# EAGLE board board_fertig (EAGLE 8.4.1)
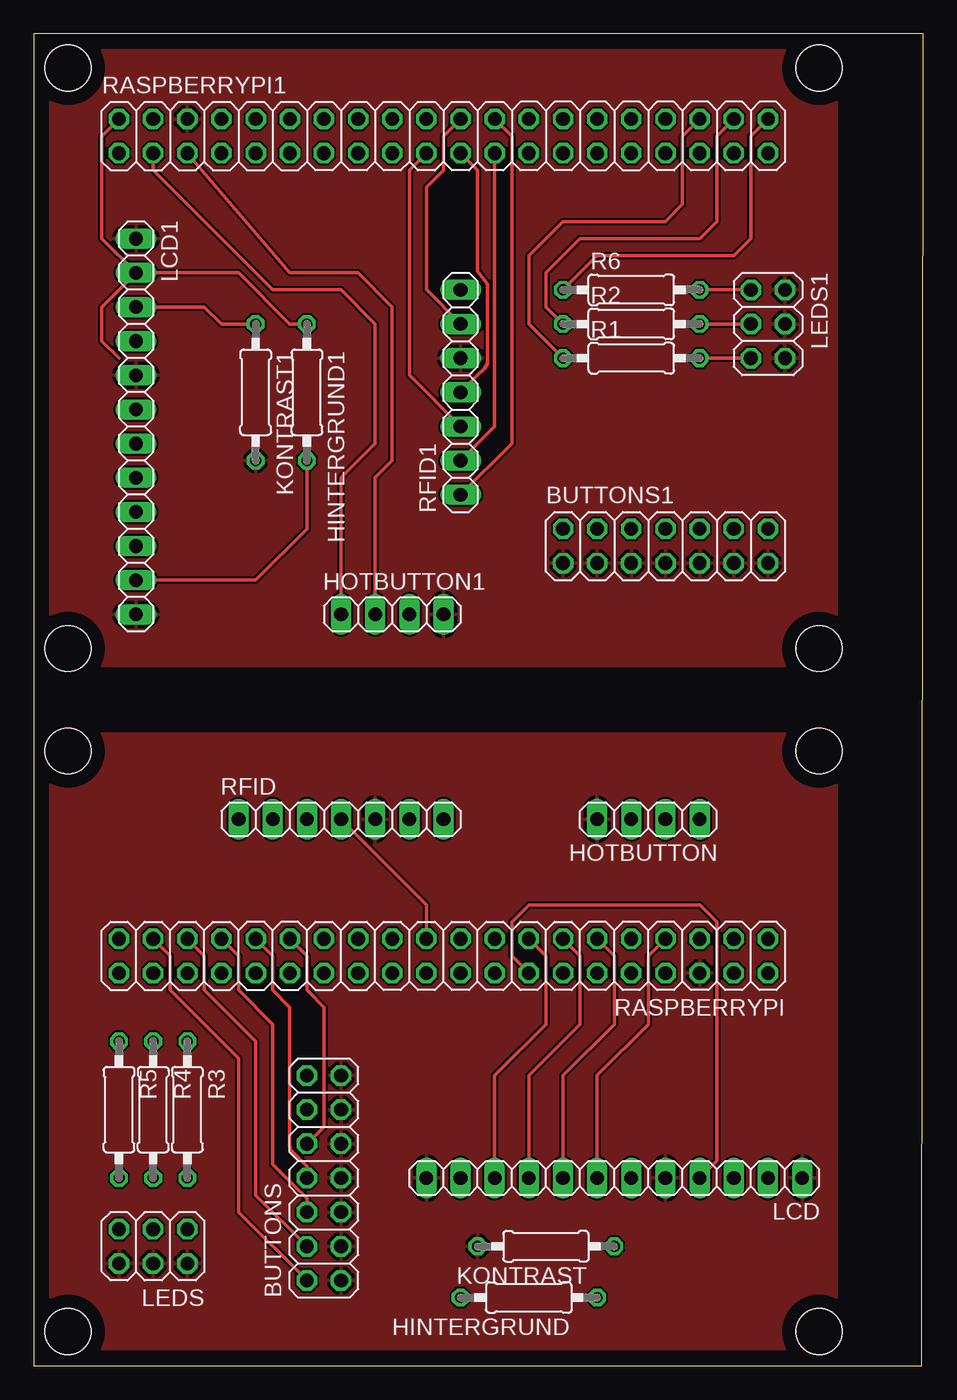
[diagram p0: board, top side]
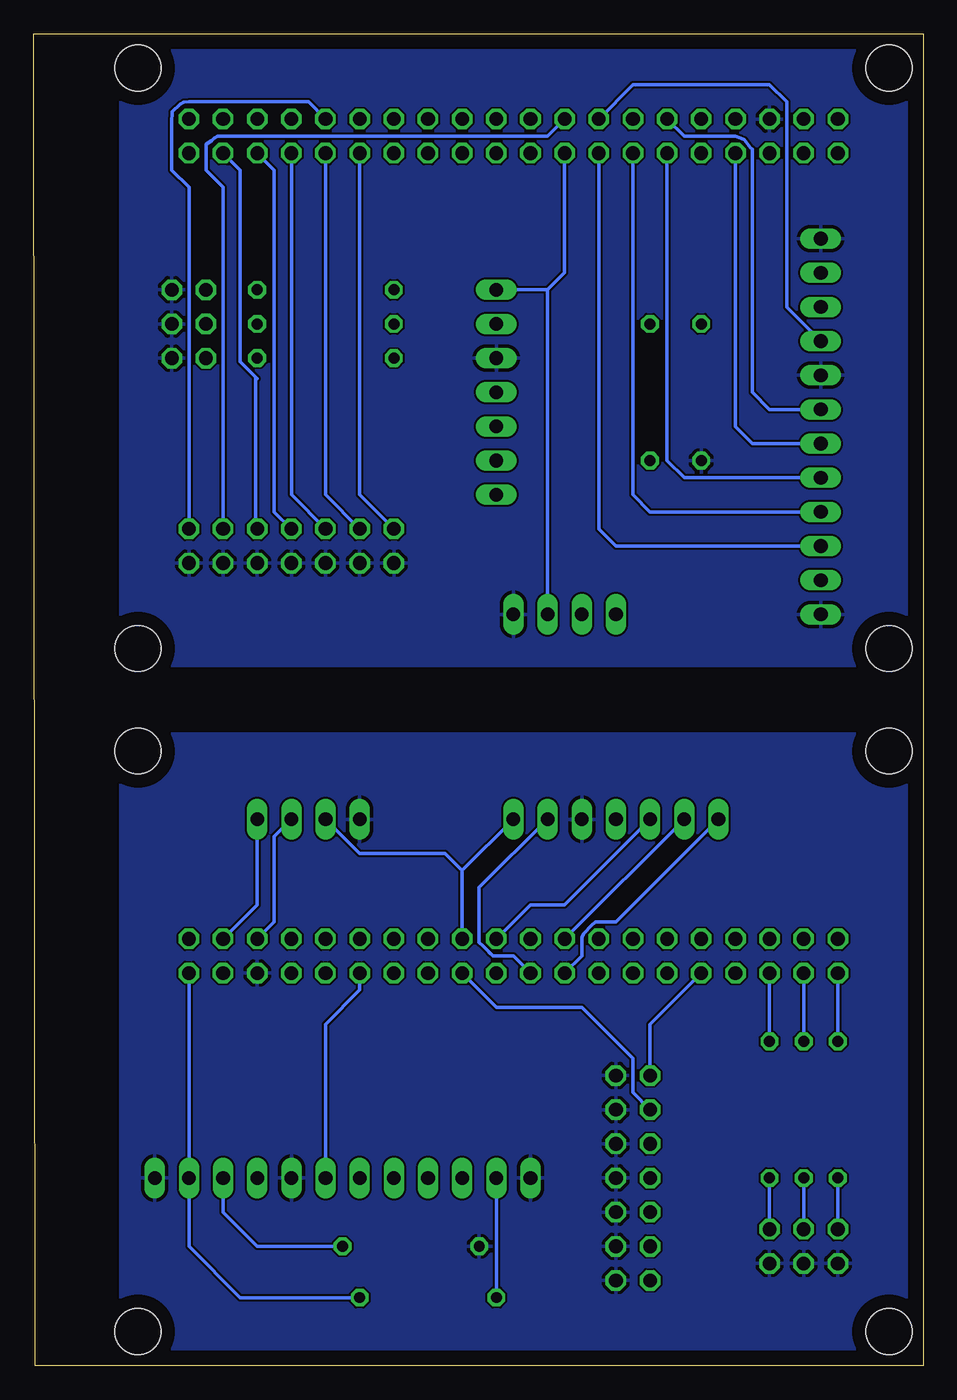
[diagram p1: board, bottom side, seen from below]

Size 66.16 x 99.06 mm. Coordinates in mm from the lower left corner, seen from the top.
Outline: 0,0 66.04,0 66.16,99.05 0.01,99.06 0,0
Copper layers (1*16): Top 0.035mm / dielectric 1.5mm / Bottom 0.035mm
Design rules "default": minimum track width 6mil, minimum drill 0.35mm, track to track 6mil, track to pad 6mil, pad to pad 6mil, via to via 6mil, smd to smd 6mil, copper to edge 40mil, drill to drill 6mil, minimum pad ring 10mil, minimum via ring 8mil, stop-mask expansion 4mil, vias tented up to drill 0mil, thermal gap 10mil
Net classes: 0 default: width 0.254 mm
Holes 3.43 mm at 2.54,45.72 58.42,45.72 2.54,2.54 58.42,2.54 2.54,96.52 58.42,96.52 2.54,53.34 58.42,53.34

## Footprints (pad centres in the part's own frame; a part is rotated, then mirrored left to right if it is on the bottom)
2X07 = drill 1.016 octagon: 1 -7.62,-1.27; 2 -7.62,1.27; 3 -5.08,-1.27; 4 -5.08,1.27; 5 -2.54,-1.27; 6 -2.54,1.27; 7 0,-1.27; 8 0,1.27; 9 2.54,-1.27; 10 2.54,1.27; 11 5.08,-1.27; 12 5.08,1.27; 13 7.62,-1.27; 14 7.62,1.27
0207/10 = drill 0.813 octagon: 1 -5.08,0; 2 5.08,0
1X04 = drill 1.016 long: 1 -3.81,0; 2 -1.27,0; 3 1.27,0; 4 3.81,0
1X12 = drill 1.016 long: 1 -13.97,0; 2 -11.43,0; 3 -8.89,0; 4 -6.35,0; 5 -3.81,0; 6 -1.27,0; 7 1.27,0; 8 3.81,0; 9 6.35,0; 10 8.89,0; 11 11.43,0; 12 13.97,0
2X03 = drill 1.016 octagon: 1 -2.54,-1.27; 2 -2.54,1.27; 3 0,-1.27; 4 0,1.27; 5 2.54,-1.27; 6 2.54,1.27
2X20 = drill 1.016 octagon: 1 -24.13,-1.27; 2 -24.13,1.27; 3 -21.59,-1.27; 4 -21.59,1.27; 5 -19.05,-1.27; 6 -19.05,1.27; 7 -16.51,-1.27; 8 -16.51,1.27; 9 -13.97,-1.27; 10 -13.97,1.27; 11 -11.43,-1.27; 12 -11.43,1.27; 13 -8.89,-1.27; 14 -8.89,1.27; 15 -6.35,-1.27; 16 -6.35,1.27; 17 -3.81,-1.27; 18 -3.81,1.27; 19 -1.27,-1.27; 20 -1.27,1.27; 21 1.27,-1.27; 22 1.27,1.27; 23 3.81,-1.27; 24 3.81,1.27; 25 6.35,-1.27; 26 6.35,1.27; 27 8.89,-1.27; 28 8.89,1.27; 29 11.43,-1.27; 30 11.43,1.27; 31 13.97,-1.27; 32 13.97,1.27; 33 16.51,-1.27; 34 16.51,1.27; 35 19.05,-1.27; 36 19.05,1.27; 37 21.59,-1.27; 38 21.59,1.27; 39 24.13,-1.27; 40 24.13,1.27
1X07 = drill 1.016 long: 1 -7.62,0; 2 -5.08,0; 3 -2.54,0; 4 0,0; 5 2.54,0; 6 5.08,0; 7 7.62,0

## Placement (x,y rotation side)
BUTTONS  [2X07]  21.59,13.97 90 top
BUTTONS1  [2X07]  46.99,60.96 0 top
HINTERGRUND  [0207/10]  36.83,5.08 180 top
HINTERGRUND1  [0207/10]  20.32,72.39 270 top
HOTBUTTON  [1X04]  45.72,40.64 180 top
HOTBUTTON1  [1X04]  26.67,55.88 0 top
KONTRAST  [0207/10]  38.1,8.89 180 top
KONTRAST1  [0207/10]  16.51,72.39 270 top
LCD  [1X12]  43.18,13.97 180 top
LCD1  [1X12]  7.62,69.85 270 top
LEDS  [2X03]  8.89,8.89 180 top
LEDS1  [2X03]  54.61,77.47 270 top
R1  330  [0207/10]  44.45,74.93 0 top
R2  330  [0207/10]  44.45,77.47 0 top
R3  330  [0207/10]  11.43,19.05 270 top
R4  330  [0207/10]  8.89,19.05 270 top
R5  330  [0207/10]  6.35,19.05 270 top
R6  330  [0207/10]  44.45,80.01 0 top
RASPBERRYPI  [2X20]  30.48,30.48 180 top
RASPBERRYPI1  [2X20]  30.48,91.44 0 top
RFID  [1X07]  22.86,40.64 0 top
RFID1  [1X07]  31.75,72.39 90 top

## Library data of the parts
BUTTONS BUTTONS1 HOTBUTTON HOTBUTTON1 LCD LCD1 LEDS LEDS1 RASPBERRYPI RASPBERRYPI1 RFID RFID1 = pinhead
HINTERGRUND HINTERGRUND1 KONTRAST KONTRAST1 R1-R6 = rcl

## Nets
+3V1: HOTBUTTON1.3 RASPBERRYPI1.17 RFID1.7
+3V3: HOTBUTTON.3 RASPBERRYPI.17 RFID.7
+5V: HINTERGRUND.1 LCD.2 RASPBERRYPI.2
+5V1: HINTERGRUND1.1 LCD1.2 RASPBERRYPI1.2
GND: BUTTONS.1 BUTTONS.3 BUTTONS.5 BUTTONS.7 BUTTONS.9 BUTTONS.11 BUTTONS.13 HOTBUTTON.4 KONTRAST.2 LCD.1 LCD.5 LCD.12 LEDS.2 LEDS.4 LEDS.6 RASPBERRYPI.6 RFID.5
GND1: BUTTONS1.1 BUTTONS1.3 BUTTONS1.5 BUTTONS1.7 BUTTONS1.9 BUTTONS1.11 BUTTONS1.13 HOTBUTTON1.4 KONTRAST1.2 LCD1.1 LCD1.5 LCD1.12 LEDS1.2 LEDS1.4 LEDS1.6 RASPBERRYPI1.6 RFID1.5
N$1: RASPBERRYPI.22 RFID.6
N$2: RASPBERRYPI.24 RFID.1
N$3: RASPBERRYPI.23 RFID.2
N$4: RASPBERRYPI.19 RFID.3
N$5: RASPBERRYPI.21 RFID.4
N$6: KONTRAST.1 LCD.3
N$7: HINTERGRUND.2 LCD.11
N$8: BUTTONS.2 RASPBERRYPI.37
N$9: BUTTONS.4 RASPBERRYPI.35
N$10: RASPBERRYPI1.22 RFID1.6
N$11: LCD.4 RASPBERRYPI.16
N$12: LCD.6 RASPBERRYPI.12
N$13: LCD.7 RASPBERRYPI.7
N$14: LCD.8 RASPBERRYPI.11
N$15: LCD.9 RASPBERRYPI.13
N$16: LCD.10 RASPBERRYPI.15
N$17: BUTTONS.8 RASPBERRYPI.31
N$18: BUTTONS.10 RASPBERRYPI.29
N$19: BUTTONS.12 RASPBERRYPI.18
N$20: BUTTONS.14 RASPBERRYPI.32
N$21: LEDS.5 R5.2
N$22: LEDS.3 R4.2
N$23: LEDS.1 R3.2
N$24: R5.1 RASPBERRYPI.40
N$25: R4.1 RASPBERRYPI.38
N$26: R3.1 RASPBERRYPI.36
N$27: HOTBUTTON.1 RASPBERRYPI.3
N$28: HOTBUTTON.2 RASPBERRYPI.5
N$29: BUTTONS.6 RASPBERRYPI.33
N$30: RASPBERRYPI1.24 RFID1.1
N$31: RASPBERRYPI1.23 RFID1.2
N$32: RASPBERRYPI1.19 RFID1.3
N$33: RASPBERRYPI1.21 RFID1.4
N$34: LCD1.4 RASPBERRYPI1.16
N$35: LCD1.7 RASPBERRYPI1.7
N$36: LCD1.8 RASPBERRYPI1.11
N$37: LCD1.9 RASPBERRYPI1.13
N$38: LCD1.10 RASPBERRYPI1.15
N$39: BUTTONS1.2 RASPBERRYPI1.29
N$40: BUTTONS1.4 RASPBERRYPI1.31
N$41: BUTTONS1.6 RASPBERRYPI1.33
N$42: BUTTONS1.8 RASPBERRYPI1.35
N$43: BUTTONS1.10 RASPBERRYPI1.37
N$44: BUTTONS1.12 RASPBERRYPI1.18
N$45: BUTTONS1.14 RASPBERRYPI1.32
N$46: R6.1 RASPBERRYPI1.40
N$47: R2.1 RASPBERRYPI1.38
N$48: R1.1 RASPBERRYPI1.36
N$49: LCD1.6 RASPBERRYPI1.12
N$50: HOTBUTTON1.1 RASPBERRYPI1.3
N$51: HOTBUTTON1.2 RASPBERRYPI1.5
N$52: LEDS1.5 R1.2
N$53: LEDS1.3 R2.2
N$54: LEDS1.1 R6.2
N$55: KONTRAST1.1 LCD1.3
N$56: HINTERGRUND1.2 LCD1.11

## Tracks (layer width: path | path; a pad name or v marks a point on that pad's centre or on a via)
+3V1
  Bottom 0.254: 27.94,80.01 26.67,81.28 RASPBERRYPI1.17 | RFID1.7 27.94,80.01 | HOTBUTTON1.3 27.94,80.01
+3V3
  Bottom 0.254: RFID.7 34.29,36.83 | 34.29,36.83 RASPBERRYPI.17 | 34.29,36.83 35.56,38.1 41.91,38.1 HOTBUTTON.3
+5V
  Bottom 0.152: 54.61,12.7 LCD.2
  Bottom 0.254: HINTERGRUND.1 50.8,5.08 54.61,8.89 LCD.2 RASPBERRYPI.2
+5V1
  Top 0.254: 6.35,74.93 5.08,76.2 5.08,78.74 LCD1.2 | LCD1.2 5.08,83.82 5.08,91.44 RASPBERRYPI1.2 | LCD1.2 15.24,81.28 19.05,77.47 HINTERGRUND1.1
GND
  pour Bottom: 1.27,46.99 59.69,46.99 59.69,1.27 1.27,1.27
  pour Top: 1.27,46.99 59.69,46.99 59.69,1.27 1.27,1.27
GND1
  pour Top: 1.27,97.79 59.69,97.79 59.69,52.07 1.27,52.07
  pour Bottom: 1.27,52.07 59.69,52.07 59.69,97.79 1.27,97.79
N$1
  Bottom 0.254: RFID.6 33.02,35.56 33.02,31.5 32.74,31.22 32.74,31.21 32.16,30.63 32.28,30.76 32,30.48 30.48,30.48 RASPBERRYPI.22
N$2
  Bottom 0.254: RFID.1 22.86,33.02 24.38,33.02 24.66,32.74 24.67,32.74 25.25,32.16 25.4,31.88 25.4,30.48 RASPBERRYPI.24
N$3
  Bottom 0.254: RFID.2 RASPBERRYPI.23
N$4
  Bottom 0.254: RFID.3 26.67,34.29 29.21,34.29 RASPBERRYPI.19
N$5
  Top 0.254: RFID.4 29.21,34.29 RASPBERRYPI.21
N$6
  Bottom 0.254: KONTRAST.1 49.53,8.89 52.07,11.43 LCD.3
N$7
  Bottom 0.254: HINTERGRUND.2 LCD.11
N$8
  Top 0.254: BUTTONS.2 15.24,11.43 15.24,22.86 10.16,27.94 10.16,30.48 RASPBERRYPI.37
N$9
  Top 0.254: BUTTONS.4 16.51,12.7 16.51,24.13 12.7,27.94 12.7,30.48 RASPBERRYPI.35
N$10
  Top 0.254: RFID1.6 29.21,80.01 29.21,87.63 30.48,88.9 30.48,91.44 RASPBERRYPI1.22
N$11
  Top 0.254: LCD.4 50.8,15.24 50.8,33.02 49.53,34.29 36.83,34.29 35.56,33.02 35.56,30.48 RASPBERRYPI.16
N$12
  Bottom 0.254: RASPBERRYPI.12 41.91,27.94 44.45,25.4 LCD.6
N$13
  Top 0.254: LCD.7 41.91,21.59 45.72,25.4 45.72,30.48 RASPBERRYPI.7
N$14
  Top 0.254: LCD.8 39.37,21.59 43.18,25.4 43.18,30.48 RASPBERRYPI.11
N$15
  Top 0.254: LCD.9 36.83,21.59 40.64,25.4 40.64,30.48 RASPBERRYPI.13
N$16
  Top 0.254: LCD.10 34.29,21.59 38.1,25.4 38.1,30.48 RASPBERRYPI.15
N$17
  Top 0.254: BUTTONS.8 20.32,14.86 19.33,15.85 19.07,16.1 19.05,16.51 19.05,26.67 17.78,27.94 17.78,30.48 RASPBERRYPI.31
N$18
  Top 0.254: BUTTONS.10 21.59,17.78 21.59,26.67 20.32,27.94 20.32,30.48 RASPBERRYPI.29
N$19
  Bottom 0.254: BUTTONS.12 21.59,20.32 21.59,22.86 25.4,26.67 31.75,26.67 RASPBERRYPI.18
N$20
  Bottom 0.254: BUTTONS.14 20.32,25.4 RASPBERRYPI.32
N$21
  Bottom 0.254: R5.2 LEDS.5
N$22
  Bottom 0.254: LEDS.3 R4.2
N$23
  Bottom 0.254: R3.2 LEDS.1
N$24
  Bottom 0.254: RASPBERRYPI.40 R5.1
N$25
  Bottom 0.254: R4.1 RASPBERRYPI.38
N$26
  Bottom 0.254: R3.1 RASPBERRYPI.36
N$27
  Bottom 0.254: HOTBUTTON.1 49.53,34.29 RASPBERRYPI.3
N$28
  Bottom 0.254: HOTBUTTON.2 48.26,39.37 48.26,33.02 RASPBERRYPI.5
N$29
  Top 0.254: BUTTONS.6 20.32,12.44 19.33,13.43 19.33,13.44 17.78,14.99 17.78,25.4 15.24,27.94 15.24,30.48 RASPBERRYPI.33
N$30
  Top 0.254: RFID1.1 35.56,68.58 35.56,91.44 RASPBERRYPI1.24
N$31
  Top 0.254: RFID1.2 34.29,69.85 RASPBERRYPI1.23
N$32
  Top 0.254: RFID1.3 27.94,73.66 27.94,88.9 RASPBERRYPI1.19
N$33
  Top 0.254: RFID1.4 33.02,73.66 33.53,74.16 33.76,74.52 33.76,80.42 33.02,81.41 33.02,88.9 RASPBERRYPI1.21
N$34
  Bottom 0.254: LCD1.4 10.16,78.74 10.16,93.98 11.43,95.25 21.59,95.25 RASPBERRYPI1.16
N$35
  Bottom 0.254: LCD1.7 12.7,68.58 13.97,69.85 RASPBERRYPI1.7
N$36
  Bottom 0.254: LCD1.8 17.78,66.04 19.05,67.31 RASPBERRYPI1.11
N$37
  Bottom 0.254: LCD1.9 20.32,63.5 21.59,64.77 RASPBERRYPI1.13
N$38
  Bottom 0.254: LCD1.10 22.86,60.96 24.13,62.23 RASPBERRYPI1.15
N$39
  Bottom 0.254: BUTTONS1.2 41.91,64.77 RASPBERRYPI1.29
N$40
  Bottom 0.254: RASPBERRYPI1.31 44.45,64.77 BUTTONS1.4
N$41
  Bottom 0.254: BUTTONS1.6 46.99,64.77 RASPBERRYPI1.33
N$42
  Bottom 0.254: BUTTONS1.8 48.26,63.5 48.26,88.9 RASPBERRYPI1.35
N$43
  Bottom 0.254: 49.53,73.41 49.66,73.53 | 49.66,73.53 50.8,74.68 50.8,88.9 RASPBERRYPI1.37 | 49.66,73.53 49.66,62.36 BUTTONS1.10
N$44
  Bottom 0.254: BUTTONS1.12 52.07,87.63 53.34,88.9 53.34,90.17 53.32,90.83 52.93,91.09 52.73,91.29 52.48,91.41 52.07,91.44 27.94,91.44 RASPBERRYPI1.18
N$45
  Bottom 0.254: BUTTONS1.14 54.61,87.63 55.88,88.9 55.88,92.71 55.86,92.99 55.86,93.25 55.27,93.83 55.02,93.96 54.61,93.98 45.72,93.98 RASPBERRYPI1.32
N$46
  Top 0.254: R6.1 41.91,82.55 52.07,82.55 53.34,83.82 53.34,91.44 RASPBERRYPI1.40
N$47
  Top 0.254: R2.1 38.1,78.74 38.1,81.28 40.64,83.82 49.53,83.82 50.8,85.09 50.8,91.44 RASPBERRYPI1.38
N$48
  Top 0.254: R1.1 36.83,77.47 36.83,82.55 39.37,85.09 46.99,85.09 48.26,86.36 48.26,91.44 RASPBERRYPI1.36
N$49
  Bottom 0.254: LCD1.6 11.43,71.12 12.7,72.39 12.7,90.17 12.72,90.45 12.85,90.58 13.31,91.16 13.56,91.29 13.97,91.44 17.78,91.44 RASPBERRYPI1.12
N$50
  Top 0.254: HOTBUTTON1.1 22.86,66.04 25.4,68.58 25.4,77.47 22.86,80.01 17.78,80.01 8.89,88.9 RASPBERRYPI1.3
N$51
  Top 0.254: HOTBUTTON1.2 25.4,66.04 26.67,67.31 26.67,78.74 24.13,81.28 19.05,81.28 RASPBERRYPI1.5
N$52
  Top 0.254: R1.2 LEDS1.5
N$53
  Top 0.254: LEDS1.3 R2.2
N$54
  Top 0.254: R6.2 LEDS1.1
N$55
  Top 0.254: LCD1.3 12.7,78.74 13.97,77.47 KONTRAST1.1
N$56
  Top 0.254: LCD1.11 16.51,58.42 20.32,62.23 HINTERGRUND1.2